# Altium PCB 5111HB015.pcbdoc (part 2 of 2)
Units mm, origin at the board's own origin, x right, y up, seen from the top; angles counter-clockwise.
Board outline 113.23 x 111.63 mm, 4 copper layers (Top Layer, Top, MID1, MID2, Bottom Layer, Bottom), stack 1.189 mm thick; 90 components, 53 nets, 462 pads, 255 vias.
Unrouted connection lines stored in the file: 24.
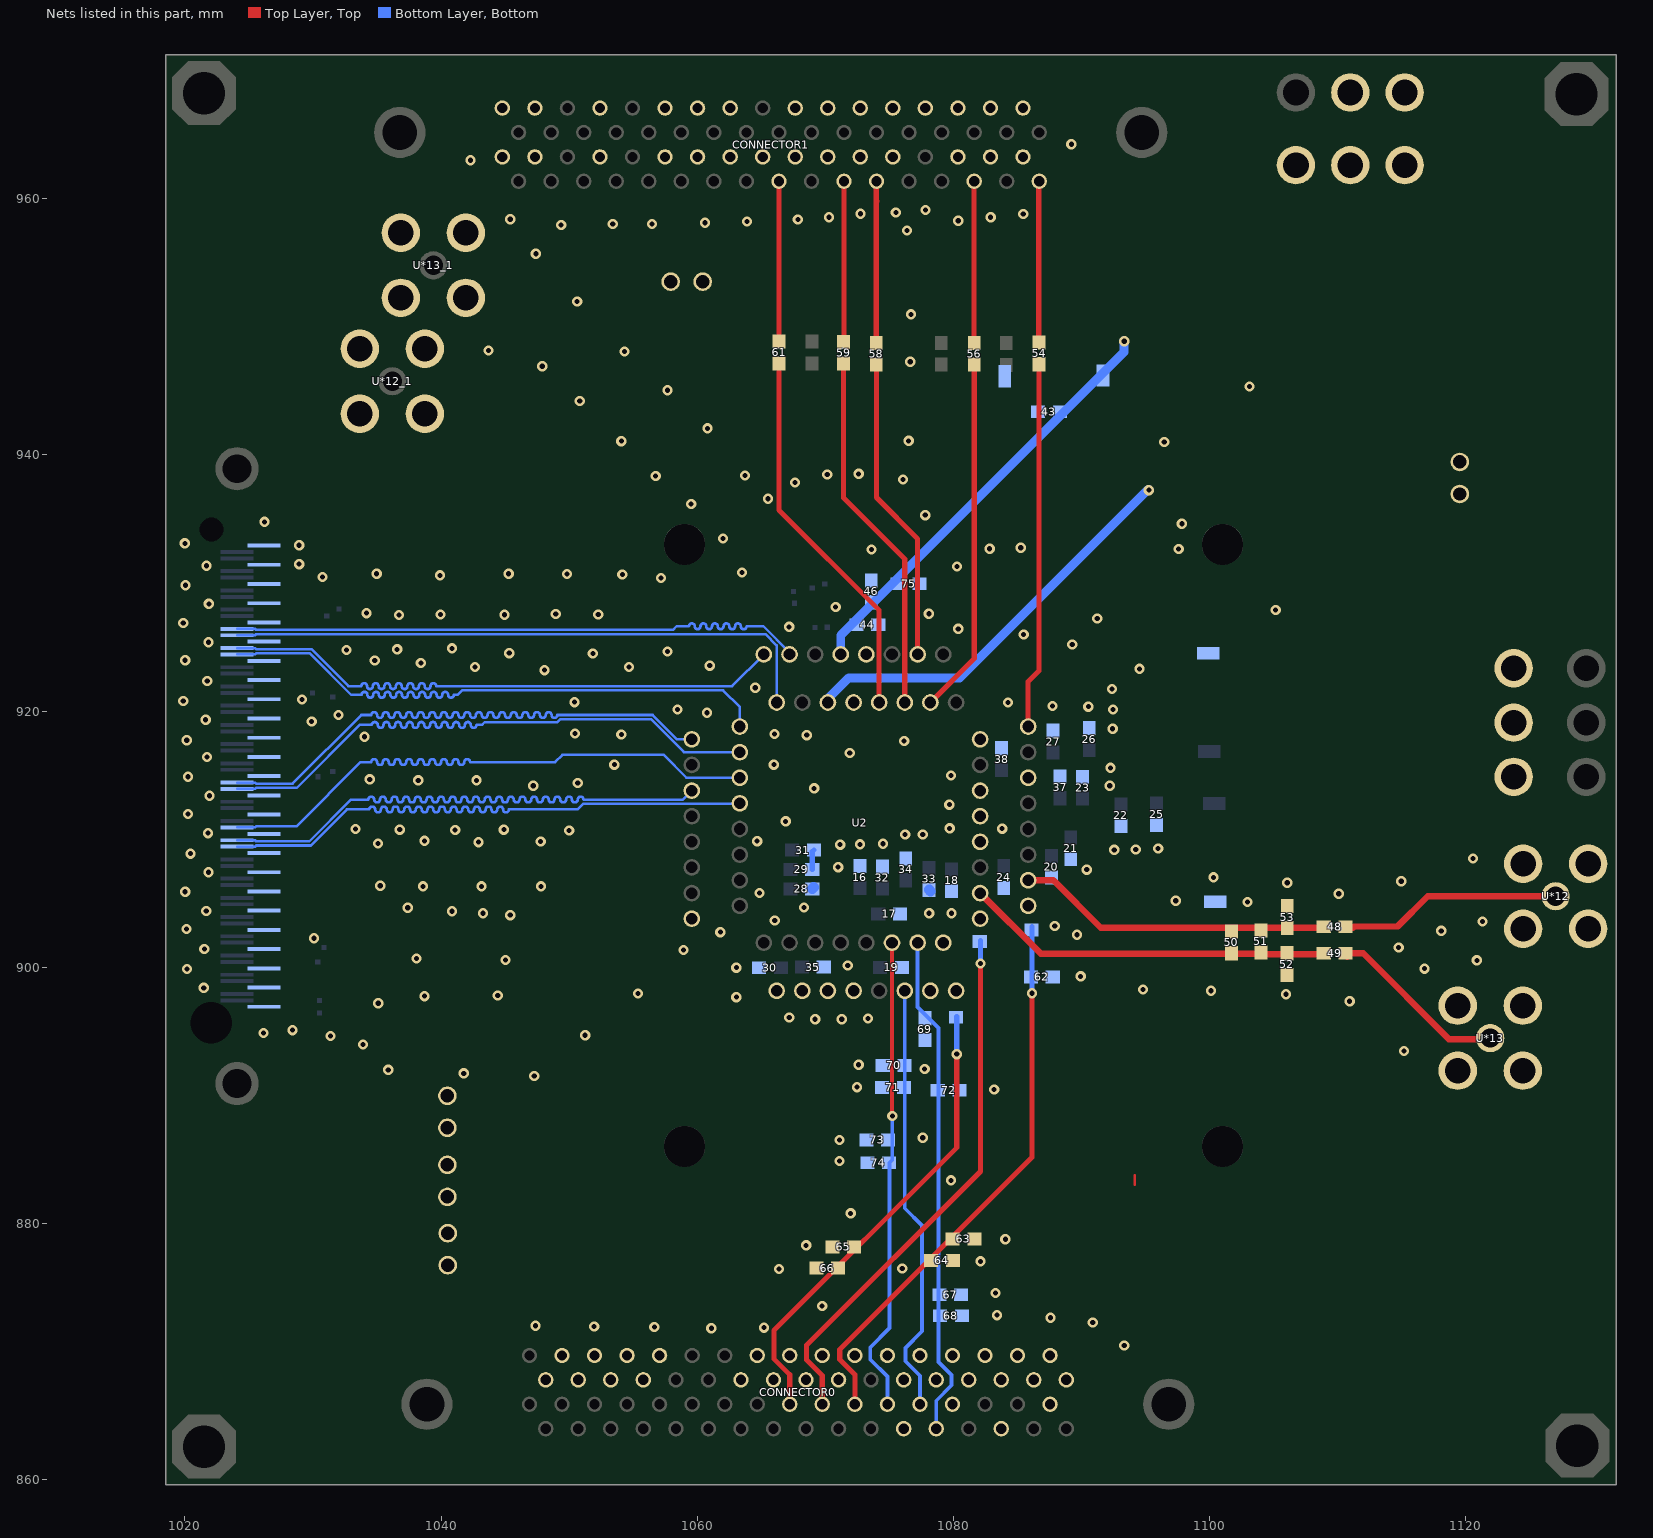
[diagram p4: the nets of this part, all layers, seen from the top]

## Via types
v1: diameter 0.8, hole 0.4, Top Layer, Top to Bottom Layer, Bottom, tented both sides, 255 vias

## Nets (pads, with @x,y where several pads share a name; then routed paths per layer and width w, separated by ;. In a path a pad name is that pad's centre, name@x,y a point inside that pad or via, vN(x,y) a via of type N, cw(c..) or ccw(c..) an arc to the next point about the centre after c; other vN are vias at no path point) (continued)
"D8_9_P  / CMS8": ?.S30 U2.45 | length 46.8
  Bottom Layer, Bottom w0.2: ?.S30@1024.075,910.925 1025.475,910.925 1025.562,911.012 1028.71,911.012 1033.722,916.025 1034.55,916.025 cw(c1034.777,916.025) 1035.004,916.025 ccw(c1035.231,916.025) 1035.458,916.025 cw(c1035.685,916.025) 1035.912,916.025 ccw(c1036.139,916.025) 1036.366,916.025 cw(c1036.593,916.025) 1036.82,916.025 ccw(c1037.047,916.025) 1037.274,916.025 cw(c1037.501,916.025) 1037.728,916.025 ccw(c1037.955,916.025) 1038.182,916.025 cw(c1038.409,916.025) 1038.636,916.025 ccw(c1038.863,916.025) 1039.09,916.025 cw(c1039.317,916.025) 1039.544,916.025 ccw(c1039.771,916.025) 1039.998,916.025 cw(c1040.225,916.025) 1040.452,916.025 ccw(c1040.679,916.025) 1040.906,916.025 cw(c1041.133,916.025) 1041.36,916.025 ccw(c1041.587,916.025) 1041.814,916.025 cw(c1042.041,916.025) 1042.268,916.025 1042.3,916.025 1048.9,916.025 1049.469,916.594 1049.609,916.594 1049.615,916.6 1057.35,916.6 1059.15,914.8 U2.45@1063.325,914.8
"D10_11_M  / CMS11": ?.S25 U2.42 | length 46.2
  Bottom Layer, Bottom w0.2: ?.S25@1024.075,914.425 1025.475,914.425 1025.563,914.338 1028.413,914.338 1033.775,919.7 1034.55,919.7 cw(c1034.777,919.7) 1035.004,919.7 ccw(c1035.231,919.7) 1035.458,919.7 cw(c1035.685,919.7) 1035.912,919.7 ccw(c1036.139,919.7) 1036.366,919.7 cw(c1036.593,919.7) 1036.82,919.7 ccw(c1037.047,919.7) 1037.274,919.7 cw(c1037.501,919.7) 1037.728,919.7 ccw(c1037.955,919.7) 1038.182,919.7 cw(c1038.409,919.7) 1038.636,919.7 ccw(c1038.863,919.7) 1039.09,919.7 cw(c1039.317,919.7) 1039.544,919.7 ccw(c1039.771,919.7) 1039.998,919.7 cw(c1040.225,919.7) 1040.452,919.7 ccw(c1040.679,919.7) 1040.906,919.7 cw(c1041.133,919.7) 1041.36,919.7 ccw(c1041.587,919.7) 1041.814,919.7 cw(c1042.041,919.7) 1042.268,919.7 ccw(c1042.495,919.7) 1042.722,919.7 cw(c1042.949,919.7) 1043.176,919.7 ccw(c1043.403,919.7) 1043.63,919.7 cw(c1043.857,919.7) 1044.084,919.7 ccw(c1044.311,919.7) 1044.538,919.7 cw(c1044.765,919.7) 1044.992,919.7 ccw(c1045.219,919.7) 1045.446,919.7 cw(c1045.673,919.7) 1045.9,919.7 ccw(c1046.127,919.7) 1046.354,919.7 cw(c1046.581,919.7) 1046.808,919.7 ccw(c1047.035,919.7) 1047.262,919.7 cw(c1047.489,919.7) 1047.716,919.7 ccw(c1047.943,919.7) 1048.17,919.7 cw(c1048.397,919.7) 1048.624,919.7 ccw(c1048.851,919.7) 1049.078,919.7 1049.35,919.7 1056.519,919.7 1058.419,917.8 U2.42@1058.927,917.8
"D10_11_P  / CMS10": ?.S26 U2.43 | length 47.2
  Bottom Layer, Bottom w0.2: ?.S26@1024.075,913.925 1025.475,913.925 1025.563,914.013 1028.738,914.013 1033.65,918.925 1034.6,918.925 cw(c1034.827,918.925) 1035.054,918.925 ccw(c1035.281,918.925) 1035.508,918.925 cw(c1035.735,918.925) 1035.962,918.925 ccw(c1036.189,918.925) 1036.416,918.925 cw(c1036.643,918.925) 1036.87,918.925 ccw(c1037.097,918.925) 1037.324,918.925 cw(c1037.551,918.925) 1037.778,918.925 ccw(c1038.005,918.925) 1038.232,918.925 cw(c1038.459,918.925) 1038.686,918.925 ccw(c1038.913,918.925) 1039.14,918.925 cw(c1039.367,918.925) 1039.594,918.925 ccw(c1039.821,918.925) 1040.048,918.925 cw(c1040.275,918.925) 1040.502,918.925 ccw(c1040.729,918.925) 1040.956,918.925 cw(c1041.183,918.925) 1041.41,918.925 ccw(c1041.637,918.925) 1041.864,918.925 cw(c1042.091,918.925) 1042.318,918.925 ccw(c1042.545,918.925) 1042.772,918.925 1043.2,918.925 1043.412,919.137 1049.084,919.137 1049.322,919.375 1056.385,919.375 1058.96,916.8 U2.43@1063.325,916.8
"D12_13_M  / CMS13": ?.S11 U2.40 | length 46.7
  Bottom Layer, Bottom w0.2: ?.S11@1024.075,924.925 1025.475,924.925 1025.563,924.838 1029.888,924.838 1032.775,921.95 1033.775,921.95 cw(c1034,921.95) 1034.225,921.95 ccw(c1034.45,921.95) 1034.675,921.95 cw(c1034.9,921.95) 1035.125,921.95 ccw(c1035.35,921.95) 1035.575,921.95 cw(c1035.8,921.95) 1036.025,921.95 ccw(c1036.25,921.95) 1036.475,921.95 cw(c1036.7,921.95) 1036.925,921.95 ccw(c1037.15,921.95) 1037.375,921.95 cw(c1037.6,921.95) 1037.825,921.95 ccw(c1038.05,921.95) 1038.275,921.95 cw(c1038.5,921.95) 1038.725,921.95 ccw(c1038.95,921.95) 1039.175,921.95 cw(c1039.4,921.95) 1039.625,921.95 1039.85,921.95 1062.725,921.95 U2.40@1065.2,924.425
"D12_13_P  / CMS12": ?.S12 U2.41 | length 46.9
  Bottom Layer, Bottom w0.2: ?.S12@1024.075,924.425 1025.475,924.425 1025.563,924.512 1029.753,924.512 1032.99,921.275 1033.8,921.275 cw(c1034.025,921.275) 1034.25,921.275 ccw(c1034.475,921.275) 1034.7,921.275 cw(c1034.925,921.275) 1035.15,921.275 ccw(c1035.375,921.275) 1035.6,921.275 cw(c1035.825,921.275) 1036.05,921.275 ccw(c1036.275,921.275) 1036.5,921.275 cw(c1036.725,921.275) 1036.95,921.275 ccw(c1037.175,921.275) 1037.4,921.275 cw(c1037.625,921.275) 1037.85,921.275 ccw(c1038.075,921.275) 1038.3,921.275 cw(c1038.525,921.275) 1038.75,921.275 ccw(c1038.975,921.275) 1039.2,921.275 cw(c1039.425,921.275) 1039.65,921.275 ccw(c1039.875,921.275) 1040.1,921.275 cw(c1040.325,921.275) 1040.55,921.275 ccw(c1040.775,921.275) 1041,921.275 1041.3,921.275 1041.65,921.625 1062.025,921.625 1063.325,920.325 U2.41@1063.325,918.8
"D14_15_M  / CMS15": ?.S9 U2.38 | length 46.9
  Bottom Layer, Bottom w0.2: ?.S9@1024.075,926.425 1025.475,926.425 1025.563,926.337 1058.1,926.337 1058.387,926.625 1058.975,926.625 1059.35,926.625 cw(c1059.575,926.625) 1059.8,926.625 ccw(c1060.025,926.625) 1060.25,926.625 cw(c1060.475,926.625) 1060.7,926.625 ccw(c1060.925,926.625) 1061.15,926.625 cw(c1061.375,926.625) 1061.6,926.625 ccw(c1061.825,926.625) 1062.05,926.625 cw(c1062.275,926.625) 1062.5,926.625 ccw(c1062.725,926.625) 1062.95,926.625 cw(c1063.175,926.625) 1063.4,926.625 ccw(c1063.625,926.625) 1063.85,926.625 1065.16,926.625 1067.2,924.585 U2.38@1067.2,924.425
"D14_15_P  / CMS14": ?.S10 U2.39 | length 47
  Bottom Layer, Bottom w0.2: ?.S10@1024.075,925.925 1025.475,925.925 1025.562,926.012 1065.312,926.012 1066.2,925.125 U2.39@1066.2,920.675
DGND: 16.2 17.1 18.2 19.1 20.1 21.1 22.1 23.2 24.2 25.1 26.2 27.2 28.2 29.2 30.1 31.2 32.2 33.1 34.2 35.1 37.2 38.2 43.2 44.1 46.1 52.2 53.1 62.1 63.2 64.2 65.1 66.1 67.1 68.1 69.2 70.1 71.1 72.2 73.1 74.1 75.1 ?.0@1040.5,884.584 ?.0@1057.925,953.525 ?.0@1119.525,939.45 ?.1@1040.5,882.084 ?.1@1084,946.125 ?.1@1100.425,905.125 ?.1@1119.525,936.95 ?.2@1099.9,924.515 ?.4 ?.5 ?.6 ?.G1 ?.G2 ?.G3 ?.G4 ?.G5 ?.G6 ?.G7 ?.G8 ?.G9 ?.G10 ?.G11 ?.G12 ?.G13 ?.G14 ?.G15 ?.G16 ?.G17 ?.G18 ?.G19 ?.G20 ?.G21 ?.G22 ?.G23 ?.G24 ?.G25 CONNECTOR0.2 CONNECTOR0.3 CONNECTOR0.4 CONNECTOR0.5 CONNECTOR0.6 CONNECTOR0.7 CONNECTOR0.8 CONNECTOR0.9 CONNECTOR0.14 CONNECTOR0.15 CONNECTOR0.16 CONNECTOR0.17 CONNECTOR0.18 CONNECTOR0.19 CONNECTOR0.20 CONNECTOR0.21 CONNECTOR0.23 CONNECTOR0.24 CONNECTOR0.25 CONNECTOR0.26 CONNECTOR0.27 CONNECTOR0.28 CONNECTOR0.29 CONNECTOR0.30 CONNECTOR0.31 CONNECTOR0.32 CONNECTOR0.33 CONNECTOR0.34 CONNECTOR0.58 CONNECTOR0.61 CONNECTOR0.64 CONNECTOR0.67 CONNECTOR1.2 CONNECTOR1.4 CONNECTOR1.6 CONNECTOR1.10 CONNECTOR1.12 CONNECTOR1.14 CONNECTOR1.16 CONNECTOR1.18 CONNECTOR1.20 CONNECTOR1.22 CONNECTOR1.24 CONNECTOR1.28 CONNECTOR1.32 CONNECTOR1.34 CONNECTOR1.36 CONNECTOR1.38 CONNECTOR1.40 CONNECTOR1.42 CONNECTOR1.44 CONNECTOR1.46 CONNECTOR1.48 CONNECTOR1.50 CONNECTOR1.54 CONNECTOR1.56 CONNECTOR1.58 CONNECTOR1.62 CONNECTOR1.66 CONNECTOR1.68 U2.6 U2.7 U2.15 U2.17 U2.19 U2.20 U2.23 U2.32 U2.33 U2.56 U2.58 U2.60 U2.62 U2.64 U*12.2 U*12.3 U*12.4 U*12.5 U*12_1.2 U*12_1.3 U*12_1.4 U*12_1.5 U*13.2 U*13.3 U*13.4 U*13.5 U*13_1.2 U*13_1.3 U*13_1.4 U*13_1.5 | length 2.6
  Top Layer, Top w0.2: 1094.15,883.05 1094.15,883.775
  Bottom Layer, Bottom w0.4: 29.2@1068.975,907.65 1068.975,909.025 31.2@1069.1,909.15
  Bottom Layer, Bottom w0.8: 28.2@1068.975,906.125 28.2@1069.1,906.25 ; 33.1@1078.1,906.05 33.1@1078.2,905.95
  other v1: 1093.325,870.475 1061.1,871.825 1065.2,871.875 1056.65,871.925 1051.95,871.975 1047.375,872.025 1090.875,872.275 1087.575,872.65 1083.4,872.85 1069.75,873.575 1083.275,874.575 1066.375,876.45 1076,876.5 1082.1,877.05 1068.5,878.3 1084.05,878.775 1071.975,880.8 1079.8,883.375 1071.1,884.875 1071.1,886.525 1077.6,886.7 1083.175,890.475 1072.475,890.65 1047.275,891.525 1041.775,891.725 1035.875,892 1077.75,892.075 1072.6,892.4 1115.175,893.475 1033.9,893.975 1031.375,894.65 1051.25,894.7 1026.15,894.875 1028.4,895.1 1069.202,895.952 1071.277,895.952 1073.327,896.002 1067.177,896.077 1035.1,897.2 1110.925,897.35 1063.05,897.675 1038.7,897.75 1044.425,897.8 1105.95,897.9 1055.375,897.95 1100.1,898.175 1094.8,898.275 1021.475,898.4 1089.925,899.3 1020.175,899.875 1116.775,899.9 1063.052,899.977 1071.75,900.15 1120.85,900.55 1045.025,900.575 1038.075,900.7 1058.925,901.35 1021.525,901.425 1114.75,901.55 1030.075,902.275 1089.65,902.55 1061.8,902.75 1118.075,902.85 1020.125,903 1087.9,903.225 1121.3,903.575 1066.05,903.65 1045.4,904.075 1043.275,904.225 1078.1,904.225 1079.85,904.225 1040.85,904.375 1021.675,904.4 1037.4,904.65 1068.327,904.677 1102.95,905.1 1097.35,905.2 1110.075,905.75 1064.852,905.802 1020.025,905.9 1038.6,906.325 1043.15,906.325 1047.8,906.325 1035.25,906.375 1106.05,906.6 1114.95,906.725 1100.3,907.025 1021.85,907.425 1090.4,907.625 1070.998,907.823 1120.55,908.5 1020.45,908.875 1092.55,909.175 1094.225,909.2 1095.975,909.275 1071.152,909.577 1072.702,909.602 1074.504,909.65 1035.075,909.675 1042.925,909.775 1047.775,909.825 1064.675,909.85 1038.7,909.875 1076.227,910.377 1077.602,910.377 1021.8,910.475 1050,910.675 1041.1,910.725 1036.775,910.75 1044.9,910.75 1033.325,910.8 1083.8,910.825 1079.7,910.85 1066.9,911.4 1020.25,911.975 1079.675,912.7 1021.925,913.4 1069.125,913.975 1047.2,914.175 1092.2,914.175 1050.675,914.4 1038.225,914.6 1042.775,914.6 1034.435,914.678 1020.25,914.875 1079.8,914.975 1092.25,915.575 1053.525,915.825 1065.975,915.825 1021.725,916.425 1071.9,916.725 1076.15,917.675 1020.15,917.725 1034.025,918 1068.55,918.125 1054.075,918.175 1066.025,918.225 1050.45,918.25 1092.425,918.625 1029.9,919.2 1021.625,919.325 1032,919.7 1060.75,919.875 1058.45,920.125 1092.45,920.125 1090.525,920.35 1087.732,920.402 1084.25,920.675 1050.425,920.7 1019.875,920.8 1029.15,920.9 1092.375,921.725 1064.525,921.825 1021.75,922.35 1048.075,923.2 1094.525,923.3 1042.65,923.45 1054.675,923.45 1060.975,923.55 1038.425,923.75 1034.825,923.95 1020.025,923.975 1051.85,924.5 1045.325,924.525 1057.675,924.65 1032.625,924.775 1036.575,924.825 1040.85,924.9 1089.275,925.2 1021.85,925.375 1085.477,925.973 1080.375,926.425 1067.173,926.582 1019.875,926.875 1091.225,927.225 1036.725,927.5 1044.95,927.525 1039.95,927.55 1052.275,927.55 1048.95,927.575 1078.075,927.6 1034.175,927.65 1105.15,927.9 1070.8,928.125 1021.875,928.375 1020.05,929.825 1057.175,930.4 1030.75,930.475 1039.925,930.6 1054.15,930.675 1049.825,930.7 1034.975,930.725 1045.275,930.725 1063.5,930.825 1080.275,931.3 1021.7,931.35 1028.925,931.475 1073.6,932.625 1082.825,932.675 1097.575,932.65 1085.25,932.75 1028.925,932.95 1020,933.1 1062,933.475 1097.825,934.625 1026.225,934.775 1077.8,935.3 1059.525,936.175 1065.523,936.577 1067.625,937.85 1076.05,938.075 1056.75,938.35 1063.723,938.402 1070.15,938.475 1072.6,938.525 1096.45,941 1054.075,941.075 1076.5,941.1 1060.798,942.077 1050.825,944.2 1057.673,945.052 1103.1,945.35 1047.9,946.925 1076.625,947.275 1054.323,948.077 1043.7,948.15 1076.675,950.975 1050.623,951.977 1047.398,955.702 1076.375,957.525 1049.375,957.95 1053.4,958.025 1056.475,958.025 1060.6,958.125 1063.875,958.225 1080.375,958.275 1067.85,958.375 1045.4,958.4 1070.275,958.55 1082.9,958.55 1085.45,958.8 1072.75,958.825 1075.5,958.925 1077.825,959.125 1042.3,963 1089.2,964.25
DGND_2: ?.0@1040.5,889.975 ?.0@1040.525,879.25 ?.1@1040.5,887.475 ?.1@1040.525,876.75 ?.1@1060.425,953.525
"DRY_M  / DLL_PG": ?.S31 U2.46 | length 46.9
  Bottom Layer, Bottom w0.2: ?.S31@1024.075,909.925 1025.475,909.925 1025.563,909.837 1029.712,909.837 1032.975,913.1 1034.325,913.1 cw(c1034.552,913.1) 1034.779,913.1 ccw(c1035.006,913.1) 1035.233,913.1 cw(c1035.46,913.1) 1035.687,913.1 ccw(c1035.914,913.1) 1036.141,913.1 cw(c1036.368,913.1) 1036.595,913.1 ccw(c1036.822,913.1) 1037.049,913.1 cw(c1037.276,913.1) 1037.503,913.1 ccw(c1037.73,913.1) 1037.957,913.1 cw(c1038.184,913.1) 1038.411,913.1 ccw(c1038.638,913.1) 1038.865,913.1 cw(c1039.092,913.1) 1039.319,913.1 ccw(c1039.546,913.1) 1039.773,913.1 cw(c1040,913.1) 1040.227,913.1 ccw(c1040.454,913.1) 1040.681,913.1 cw(c1040.908,913.1) 1041.135,913.1 ccw(c1041.362,913.1) 1041.589,913.1 cw(c1041.816,913.1) 1042.043,913.1 ccw(c1042.27,913.1) 1042.497,913.1 cw(c1042.724,913.1) 1042.951,913.1 ccw(c1043.178,913.1) 1043.405,913.1 cw(c1043.632,913.1) 1043.859,913.1 ccw(c1044.086,913.1) 1044.313,913.1 cw(c1044.54,913.1) 1044.767,913.1 ccw(c1044.994,913.1) 1045.221,913.1 cw(c1045.448,913.1) 1045.675,913.1 ccw(c1045.902,913.1) 1046.129,913.1 cw(c1046.356,913.1) 1046.583,913.1 ccw(c1046.81,913.1) 1047.037,913.1 cw(c1047.264,913.1) 1047.491,913.1 ccw(c1047.718,913.1) 1047.945,913.1 cw(c1048.172,913.1) 1048.399,913.1 ccw(c1048.626,913.1) 1048.853,913.1 cw(c1049.08,913.1) 1049.307,913.1 ccw(c1049.534,913.1) 1049.761,913.1 cw(c1049.988,913.1) 1050.215,913.1 ccw(c1050.442,913.1) 1050.669,913.1 cw(c1050.896,913.1) 1051.123,913.1 1051.2,913.1 1058.875,913.1 U2.46@1059.575,913.8 ccw(c1059.45,913.675) U2.46@1059.45,913.852
"DRY_P  / CMSCLK": ?.S32 U2.47 | length 47
  Bottom Layer, Bottom w0.2: ?.S32@1024.075,909.425 1025.475,909.425 1025.562,909.512 1029.847,909.512 1032.66,912.325 1034.4,912.325 cw(c1034.627,912.325) 1034.854,912.325 ccw(c1035.081,912.325) 1035.308,912.325 cw(c1035.535,912.325) 1035.762,912.325 ccw(c1035.989,912.325) 1036.216,912.325 cw(c1036.443,912.325) 1036.67,912.325 ccw(c1036.897,912.325) 1037.124,912.325 cw(c1037.351,912.325) 1037.578,912.325 ccw(c1037.805,912.325) 1038.032,912.325 cw(c1038.259,912.325) 1038.486,912.325 ccw(c1038.713,912.325) 1038.94,912.325 cw(c1039.167,912.325) 1039.394,912.325 ccw(c1039.621,912.325) 1039.848,912.325 cw(c1040.075,912.325) 1040.302,912.325 ccw(c1040.529,912.325) 1040.756,912.325 cw(c1040.983,912.325) 1041.21,912.325 ccw(c1041.437,912.325) 1041.664,912.325 cw(c1041.891,912.325) 1042.118,912.325 ccw(c1042.345,912.325) 1042.572,912.325 cw(c1042.799,912.325) 1043.026,912.325 ccw(c1043.253,912.325) 1043.48,912.325 cw(c1043.707,912.325) 1043.934,912.325 ccw(c1044.161,912.325) 1044.388,912.325 cw(c1044.615,912.325) 1044.842,912.325 ccw(c1045.069,912.325) 1045.296,912.325 1045.475,912.325 1050.65,912.325 1051.094,912.769 1051.225,912.769 1051.231,912.775 1063.3,912.775 U2.47@1063.325,912.8 U2.47@1063.225,912.9
DVCC_2,5V: ?.1@1115.217,968.289 U2.35 | length 32.1
  Bottom Layer, Bottom w0.7: U2.35@1070.2,920.675 1070.2,920.975 1071.825,922.6 1080.475,922.6 1095.125,937.25 v1(1095.25,937.25)
DVDD_1,2V: 43.1 44.2 46.2 75.2 ?.2@1091.665,946.2 ?.2@1110.975,968.289 U2.34 | length 33.6
  Bottom Layer, Bottom w0.7: U2.34@1071.2,924.425 1071.2,925.925 1093.325,948.05 v1(1093.325,948.875)
ENCAL: 58.1 58.2 CONNECTOR1.11 U2.28 | length 36.6
  Top Layer, Top w0.4: 58.2@1073.975,947.05 1073.98,947.045 1073.98,936.67 1077.2,933.45 U2.28@1077.2,924.425 ; 58.1@1073.975,948.75 CONNECTOR1.11@1073.975,961.355 ; 1074.025,959.805 1074.03,959.81
ENCALG: 54.1 54.2 CONNECTOR1.1 U2.24 | length 41.2
  Top Layer, Top w0.4: U2.24@1085.825,918.8 1085.825,922.3 1086.675,923.15 54.2@1086.675,947.075 ; 54.1@1086.655,948.775 CONNECTOR1.1@1086.655,961.36
LATCHDEL: 56.1 56.2 CONNECTOR1.5 U2.27 | length 40.4
  Top Layer, Top w0.4: U2.27@1078.2,920.675 1081.625,924.1 56.2@1081.625,947.05 ; 56.1@1081.6,948.75 CONNECTOR1.5@1081.6,961.36
NENCMS: 59.1 59.2 CONNECTOR1.13 U2.29 | length 41
  Top Layer, Top w0.4: 59.2@1071.425,947.125 1071.425,936.65 1076.2,931.875 U2.29@1076.2,920.675 ; 59.1@1071.425,948.825 1071.44,948.84 CONNECTOR1.13@1071.44,961.36
RESET: 61.1 61.2 CONNECTOR1.17 U2.31 | length 42.2
  Top Layer, Top w0.4: 61.2@1066.385,947.15 1066.385,935.69 1074.2,927.875 U2.31@1074.2,920.675 ; 61.1@1066.385,948.85 CONNECTOR1.17@1066.385,961.36
VCMI: 62.2 63.1 64.1 ?.1@1086.075,902.925 CONNECTOR0.55 U2.10 | length 44
  Top Layer, Top w0.4: CONNECTOR0.55@1072.3,865.895 1072.3,868.225 1071.125,869.4 1071.125,870.175 1086.125,885.175 v1(1086.125,897.975)
  Bottom Layer, Bottom w0.4: v1(1086.125,897.975) ?.1@1086.125,903.175
VCMO: 73.2 74.2 CONNECTOR0.57 U2.3 | length 37.4
  Top Layer, Top w0.3: U2.3@1075.2,901.925 1075.2,888.4 1075.225,888.375 v1(1075.225,888.4)
  Bottom Layer, Bottom w0.3: CONNECTOR0.57@1074.84,865.895 1074.84,868.06 1073.5,869.4 1073.5,870.325 1075.01,871.835 1075.01,884.75 1075.225,884.965 v1(1075.225,888.4)
VIN: 48.1 48.2 50.1 51.1 53.2 U2.12 U*12.1 | length 42
  Top Layer, Top w0.5: U2.12@1085.825,906.8 1087.8,906.8 1091.5,903.1 1106.05,903.1 48.2@1108.9,903.1 ; 48.1@1111.15,903.075 1111.265,903.19 1114.665,903.19 1117.025,905.55 1126.875,905.55 U*12.1@1127.35,905.075
VIP: 49.1 49.2 50.2 51.2 52.1 U2.11 U*13.1 | length 43.2
  Top Layer, Top w0.5: U2.11@1082.075,905.8 1086.825,901.05 51.2@1104,901.05 ; 51.2@1104,901.175 1104.15,901.025 49.2@1109.225,901.025 ; 49.1@1110.725,900.825 1111,901.1 1111.975,901.1 1118.675,894.4 U*13.1@1121.9,894.4
VREFNI: 65.2 66.2 ?.1@1080.2,896.1 CONNECTOR0.51 U2.8 | length 36.7
  Top Layer, Top w0.4: CONNECTOR0.51@1067.22,865.895 1067.22,868.205 1065.975,869.45 1065.975,871.65 1080.25,885.925 v1(1080.25,893.225)
  Bottom Layer, Bottom w0.4: v1(1080.25,893.225) ?.1@1080.25,896.175
VREFNO: 67.2 68.2 69.1 72.1 CONNECTOR0.60 U2.5 | length 39.5
  Bottom Layer, Bottom w0.3: U2.5@1077.2,901.925 1077.2,896.9 1078.82,895.28 1078.82,869.205 1079.85,868.175 1079.85,867.375 1078.65,866.175 CONNECTOR0.60@1078.65,863.99
VREFPI: ?.1@1082.05,902.025 CONNECTOR0.53 U2.9 | length 42.3
  Top Layer, Top w0.4: CONNECTOR0.53@1069.76,865.895 1069.76,868.14 1068.525,869.375 1068.525,870.5 1082.1,884.075 v1(1082.1,900.3)
  Bottom Layer, Bottom w0.4: v1(1082.1,900.3) ?.1@1082.1,902.1
VREFPO: 70.2 71.2 CONNECTOR0.59 U2.4 | length 33.8
  Bottom Layer, Bottom w0.3: U2.4@1076.2,898.175 1076.2,890.625 1076.2,881.2 1077.55,879.85 1077.55,871.6 1076.25,870.3 1076.25,869.25 1077.38,868.12 CONNECTOR0.59@1077.38,865.895
pads on no net: ?.3 ?.MH1 ?.MH2 ?.MH3 ?.MH4 ?.S1 ?.S2 ?.S3 ?.S4 ?.S15 ?.S16 ?.S17 ?.S18 ?.S19 ?.S20 ?.S21 ?.S22 ?.S23 ?.S24 ?.S47 ?.S48 CONNECTOR0.1 CONNECTOR0.10 CONNECTOR0.11 CONNECTOR0.12 CONNECTOR0.13 CONNECTOR0.22 CONNECTOR0.35 CONNECTOR0.36 CONNECTOR0.37 CONNECTOR0.38 CONNECTOR0.39 CONNECTOR0.40 CONNECTOR0.41 CONNECTOR0.42 CONNECTOR0.43 CONNECTOR0.44 CONNECTOR0.45 CONNECTOR0.46 CONNECTOR0.47 CONNECTOR0.48 CONNECTOR0.49 CONNECTOR0.50 CONNECTOR0.52 CONNECTOR0.54 CONNECTOR0.56 CONNECTOR0.62 CONNECTOR0.63 CONNECTOR0.65 CONNECTOR0.66 CONNECTOR0.68 CONNECTOR0.70 CONNECTOR0.72 CONNECTOR1.8 CONNECTOR1.9 CONNECTOR1.19 CONNECTOR1.21 CONNECTOR1.23 CONNECTOR1.25 CONNECTOR1.26 CONNECTOR1.27 CONNECTOR1.29 CONNECTOR1.30 CONNECTOR1.31 CONNECTOR1.33 CONNECTOR1.35 CONNECTOR1.37 CONNECTOR1.39 CONNECTOR1.41 CONNECTOR1.43 CONNECTOR1.45 CONNECTOR1.47 CONNECTOR1.49 CONNECTOR1.51 CONNECTOR1.52 CONNECTOR1.53 CONNECTOR1.55 CONNECTOR1.57 CONNECTOR1.59 CONNECTOR1.60 CONNECTOR1.61 CONNECTOR1.63 CONNECTOR1.64 CONNECTOR1.65 CONNECTOR1.67 CONNECTOR1.70 CONNECTOR1.72 U2.22

## Polygon pours and split planes (outlines as drawn)
AVDD_1,2V on MID1 "AVDD_1.2V" (solid, pour order 12): 1131.744,968.925 1131.6,971.127 1121.7,971.25 1121.7,959.575 1083.642,921.517 1081.5,919.375 1073.45,919.375 1077.313,915.188 1077.64,914.86 1090.675,914.95 1117.536,915.136 1119.5,917.1 1124.05,917.1 1131.45,917.1 1131.6,916.95
AVCC_+2,5V on MID1 "AVCC_2.5V" (solid, pour order 14): 1131.6,916.95 1131.45,917.1 1119.5,917.1 1118.875,916.475 1117.35,914.95 1117.325,914.95 1105.425,914.95 1104.35,913.875 1104.35,911.425 1104.35,859.55 1131.6,859.744
DVCC_2,5V on MID1 "DVCC_2_5" (solid, pour order 30): 1113.125,971.2 1121.1,971.2 1121.125,971.175 1121.1,971.15 1121.1,959.7 1121.075,959.7 1081.225,919.9 1079.075,919.9 1073.225,919.9 1073.225,922 1074.15,922.925 1074.2,922.975 1074.2,925.3 1074.2,926.925 1101.9,954.625 1106.2,958.925 1110.6,958.925 1111.125,958.925 1112.925,960.725 1113.05,960.85 1113.05,970.8
DVDD_1,2V on MID1 "DVDD_1_2" (solid, pour order 32): 1113.125,971.2 1113.125,970.875 1113.05,970.8 1113.05,960.85 1111.125,958.925 1106.2,958.925 1073.725,926.45 1069.6,926.45 1069.55,926.45 1067.35,928.65 1065.475,930.525 1065.475,955.875 1065.475,965.5 1065.475,971.25 1071.125,971.15 1091.125,971.15 1091.175,971.2 1112.125,971.2
DGND_2 on MID1 "DGND_1" (solid, pour order 36): 1018.475,859.625 1018.5,859.65 1042.375,859.65 1042.75,859.65 1043.25,859.625 1047.575,859.65 1093.45,859.65 1093.45,859.625 1093.525,859.55 1104.35,859.55 1104.35,914.025 1103.325,915.05 1103.135,914.86 1077.64,914.86 1077.64,915.185 1073.45,919.375 1072.5,919.375 1066,912.875 1066.025,912.85 1066.025,904.575 1066,904.575 1044.45,883.025 1018.475,883.025
DGND_2 on MID1 "DGND_1" (solid, pour order 38): 1018.525,883.525 1044.35,883.525 1065.55,904.725 1065.55,908.125 1065.55,913.1 1066.225,913.775 1072.383,919.933 1073.225,919.933 1073.225,922 1074.2,922.975 1074.2,925.975 1073.725,926.45 1069.55,926.45 1065.475,930.525 1065.475,965.5 1065.3,965.5 1065.3,971.2 1059.6,971.2 1040.075,971.2 1040.025,971.25 1040,971.275 1018.3,971.275 1018.3,883.725 1018.525,883.5
DGND on Bottom Layer, Bottom "DGND" (solid, pour order 26): 1018.5,883.525 1018.584,883.441 1044.315,883.49 1065.525,904.7 1065.525,913.075 1072.35,919.9 1081.275,919.9 1121.125,959.75 1121.125,971.175 1091.125,971.25 1091.125,971.175 1040.325,971.175 1040.325,971.2 1018.55,971.2 1018.525,971.225 1018.475,971.175 1018.475,883.775
DGND on Bottom Layer, Bottom "AGND" (solid, pour order 18): 1018.475,859.725 1018.55,859.65 1042.625,859.65 1042.625,859.905 1093.425,859.9 1093.45,859.875 1093.525,859.8 1131.675,859.8 1131.675,971.3 1131.65,971.325 1131.55,971.225 1121.725,971.225 1121.725,959.6 1081.525,919.4 1072.55,919.4 1066.025,912.875 1066.025,904.625 1066.025,904.6 1044.525,883.1 1044.425,883 1018.5,883
DGND on Top Layer, Top "AGND" (solid, pour order 22): 1018.475,859.725 1018.55,859.65 1042.625,859.65 1131.675,859.65 1131.675,971.3 1131.65,971.325 1131.55,971.225 1121.75,971.225 1121.75,959.625 1088.325,926.2 1081.525,919.4 1072.55,919.4 1066.025,912.875 1066.025,904.625 1066.025,904.6 1044.525,883.1 1044.425,883 1018.475,883
DGND on Top Layer, Top "DGND" (solid, pour order 24): 1018.5,883.525 1018.525,883.5 1044.325,883.5 1065.525,904.7 1065.525,913.075 1072.375,919.925 1081.3,919.925 1121.125,959.75 1121.125,971.175 1091.125,971.25 1091.125,971.175 1040.325,971.175 1040.325,971.2 1018.55,971.2 1018.525,971.225 1018.475,971.175 1018.475,883.775
DGND on MID2 (split plane): 1131.213,860.131 1019.011,860.131 1019.01,883.023 1044.4,883.023 1044.465,883.031 1044.526,883.057 1044.578,883.097 1065.953,904.472 1065.993,904.524 1066.019,904.585 1066.027,904.65 1066.027,912.871 1072.554,919.398 1081.425,919.398 1081.49,919.406 1081.551,919.432 1081.603,919.472 1085.116,922.984 1088.013,925.881 1088.015,925.881 1088.076,925.907 1088.128,925.947 1088.168,925.999 1088.194,926.06 1088.194,926.062 1113.978,951.847 1114.018,951.899 1114.044,951.96 1114.052,952.025 1114.044,952.09 1114.018,952.151 1113.978,952.203 1113.926,952.243 1113.865,952.269 1113.8,952.277 1113.735,952.269 1113.674,952.243 1113.622,952.203 1087.772,926.353 1087.761,926.339 1087.747,926.328 1084.759,923.341 1081.321,919.902 1072.45,919.902 1072.385,919.894 1072.324,919.868 1072.294,919.846 1072.272,919.828 1065.597,913.153 1065.557,913.101 1065.531,913.04 1065.523,912.975 1065.523,904.754 1044.296,883.527 1019.01,883.527 1019.009,970.74 1121.148,970.74 1121.148,959.729 1117.022,955.603 1116.982,955.551 1116.956,955.49 1116.948,955.425 1116.956,955.36 1116.982,955.299 1117.022,955.247 1117.074,955.207 1117.135,955.181 1117.2,955.173 1117.265,955.181 1117.326,955.207 1117.378,955.247 1121.578,959.447 1121.618,959.499 1121.644,959.56 1121.652,959.625 1121.652,959.65 1121.652,970.74 1131.213,970.74

## Other copper
Top Layer, Top:
  text "5111HB015" at 1127.9,958.875 h1.52 r270
Bottom Layer, Bottom:
  text "73" at 1032.575,932.5 h0.52
MID2 (plane layer: these items are gaps in the copper):
  lines w0.5: 1018.425,883.275 1044.4,883.275 1065.775,904.65 1065.775,912.975 1072.45,919.65 1081.425,919.65 1084.937,923.162 1087.925,926.15 1087.95,926.125 1087.95,926.175 1113.8,952.025 ; 1117.2,955.425 1121.4,959.625 1121.4,959.65 1121.4,971.25

## Silkscreen, mask and mechanical layers (free items; w line width, h text height)
Mechanical 1, Board:
  lines w0.2: 1018.498,971.25 1040.475,971.25 1085.95,971.25 1091.123,971.25 1131.547,971.25 1131.723,971.073 1131.723,859.62 1131.723,859.248 1131.7,859.225 1093.275,859.225 1047.8,859.225 1042.85,859.225 1018.5,859.225 1018.498,971.25

## Text inside footprints (layer, text, board x,y; h text height)
?: Top Overlay, Top Silk "GND" at 1116.384,959.866 h1.52 r180
?: Top Overlay, Top Silk "GND" at 1120.966,913.7 h1.52 r90